# Altium PCB BuckConverter.PcbDoc
Units mm, origin at the board's own origin, x right, y up, seen from the top; angles counter-clockwise.
Board outline 40.64 x 20.32 mm, 2 copper layers (Top Layer, Bottom Layer); 39 components, 16 nets, 118 pads, 59 vias.
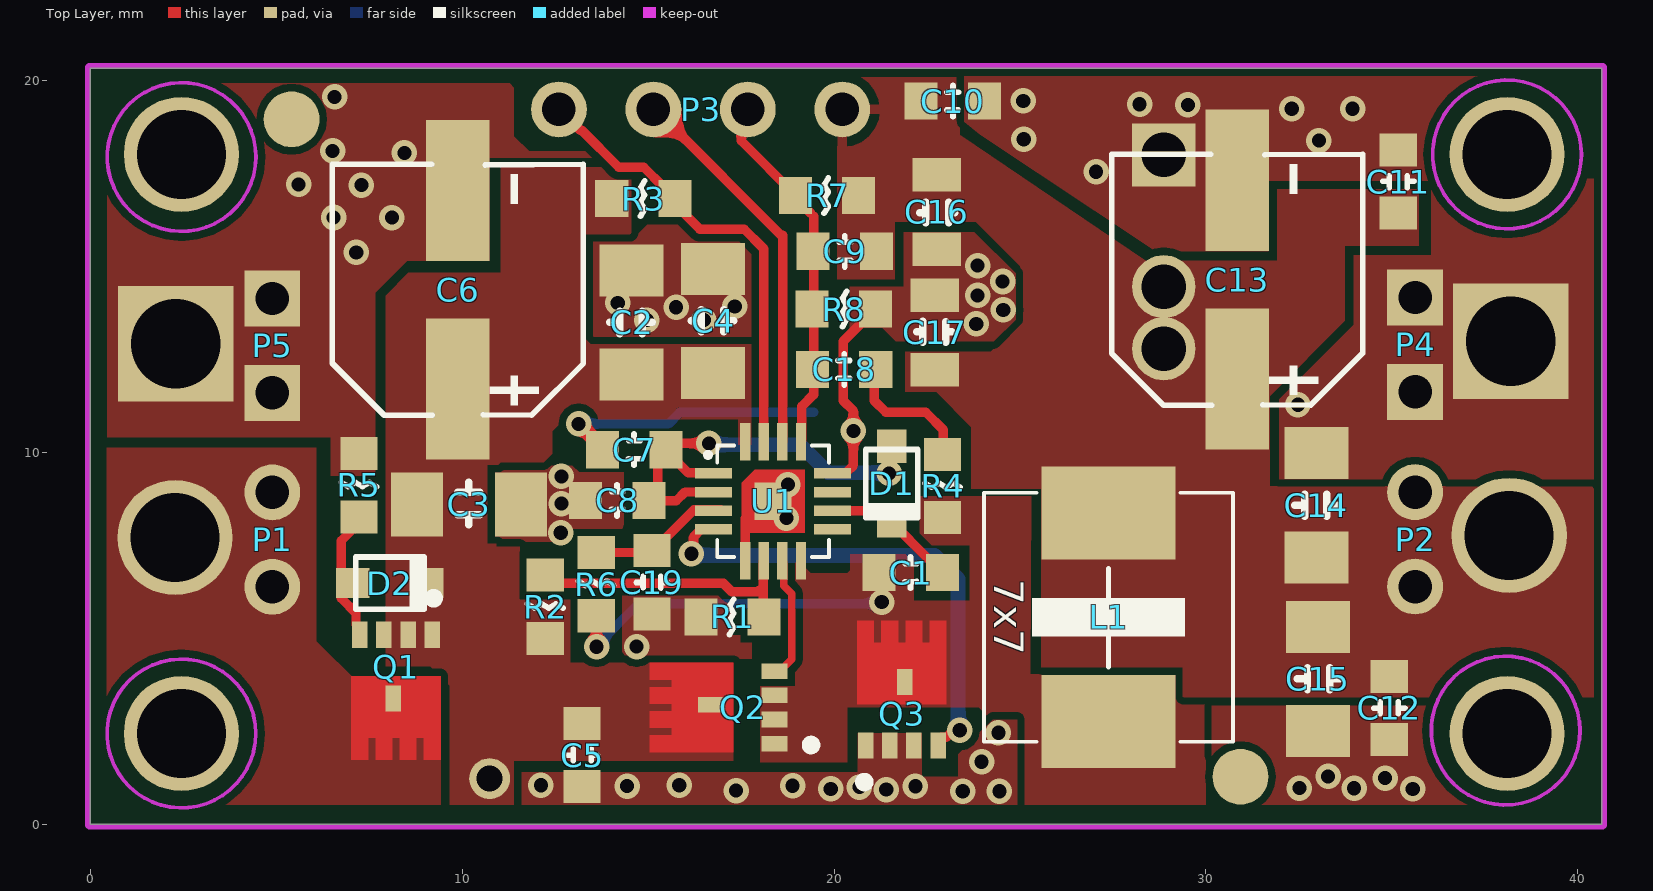
[diagram p0: Top Layer view]
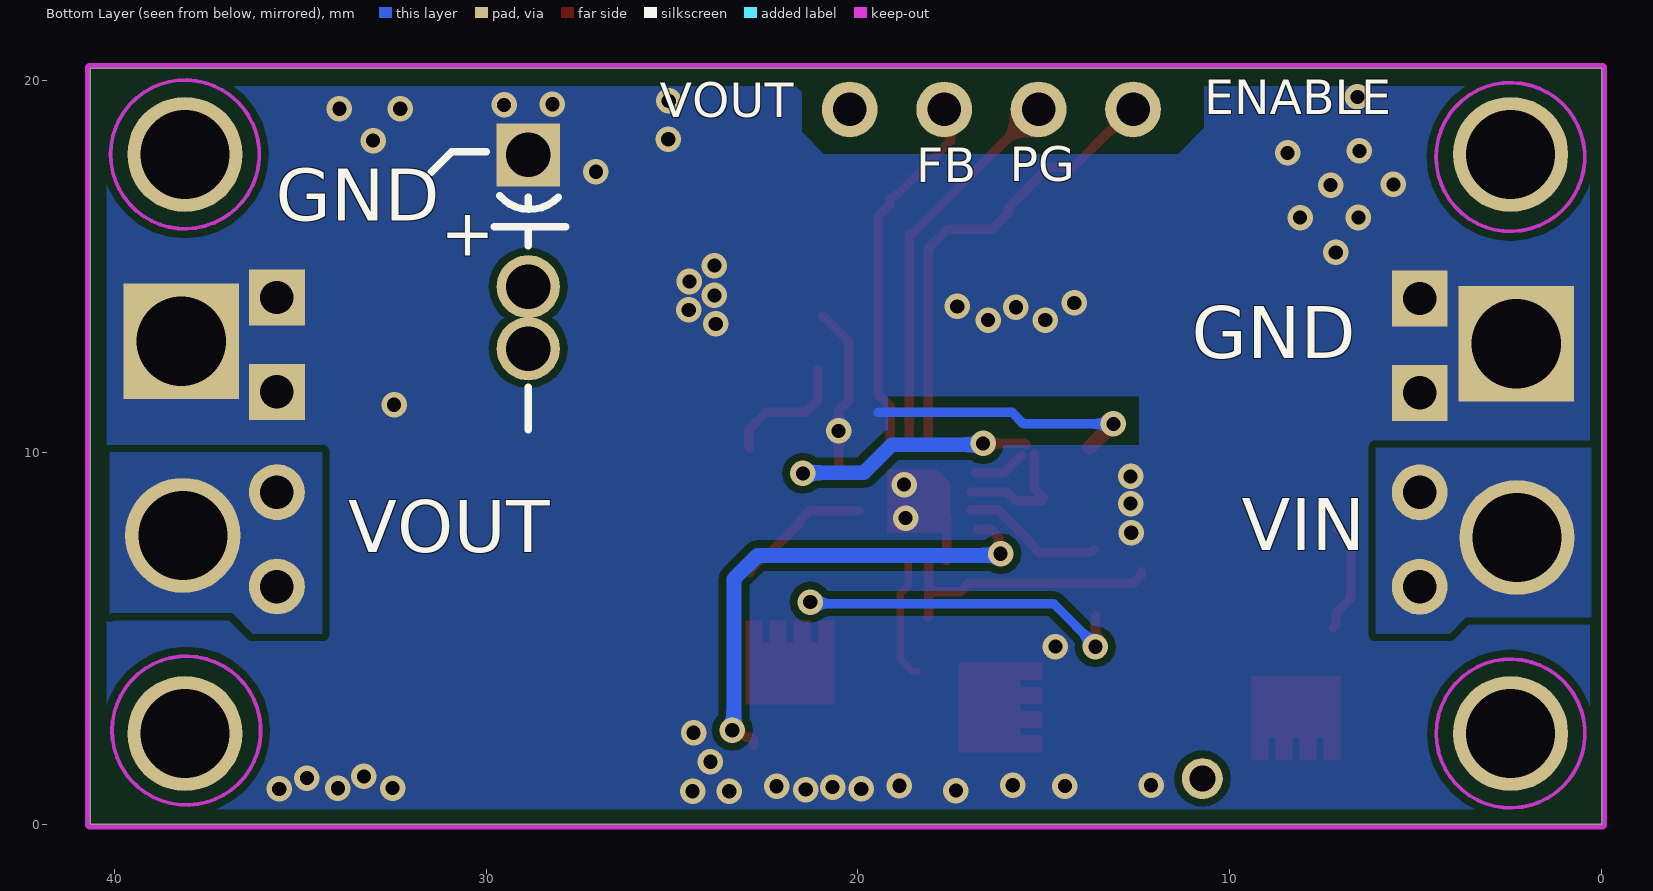
[diagram p1: Bottom Layer view, seen from below]
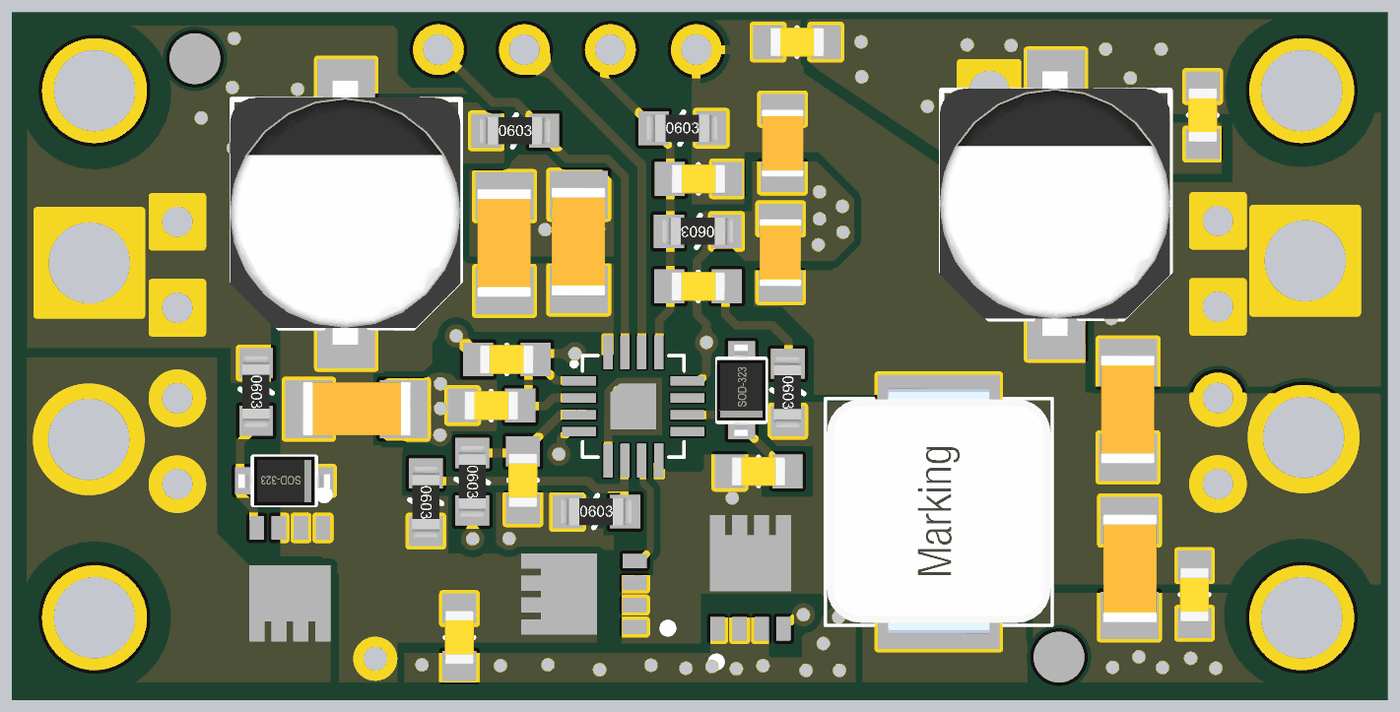
[diagram p2: 3D render of the assembled board from above, using the file's embedded part models]

## Layer stack, top to bottom
Top Solder: solder mask 0.0102, Solder Resist, Dk 3.5
Top Layer: signal copper 0.0356
Dielectric 1: dielectric 0.32, FR-4, Dk 4.8
Bottom Layer: signal copper 0.0356
Bottom Solder: solder mask 0.0102, Solder Resist, Dk 3.5

## Board outline
0,0 40.64,0 40.64,20.32 0,20.32

## Design rules (kind name [scope] priority, off if disabled: settings)
Clearance [All] p1: gap=0.2 ignorepadtopadclearanceinfootprint=FALSE
PlaneConnect [All] p1: planeconnectstyle=Direct reliefexpansion=0.508 reliefentries=4 reliefconductorwidth=0.254 reliefairgap=0.254
PolygonConnect CAM_PolygonConnect_$Net7 [InNet('$Net7')] p1: connectstyle=Direct reliefconductorwidth=0.254 reliefentries=4 polygonreliefangle="90 Angle" airgapwidth=0.254
PolygonConnect CAM_PolygonConnect_$Net0 [InNet('$Net0')] p2: connectstyle=Direct reliefconductorwidth=0.254 reliefentries=4 polygonreliefangle="90 Angle" airgapwidth=0.254
PolygonConnect [All] p3: connectstyle=Direct reliefconductorwidth=0.254 reliefentries=4 polygonreliefangle="90 Angle" airgapwidth=0.254
RoutingVias [All] p1: holewidth=0.711 width=1.27 viastyle="Through Hole" minholewidth=0.711 minwidth=1.27 maxholewidth=0.711 maxwidth=1.27
SolderMaskExpansion [All] p1: expansion=0.102 istentingtop=FALSE
Width [All] p1: maxlimit=0.254 minlimit=0.254 preferedwidth=0.254
29 further rules are at their usual default settings.

## Components (designator, comment, footprint, x,y, rotation, side; value= is the part's Value field where it differs from the comment)
C1 "100nF" C0603-NO 22.06,6.76 r180 top
C2 "2.2uF/50V" C1206-NO 14.554,13.491 r90 top
C3 "2.2uF/50V" C1206-NO 10.177,8.597 r0 top
C4 "2.2uF/50V" C1206-NO 16.748,13.533 r90 top
C5 "0.47uF/50V" C0603-NO 13.222,1.855 r270 top
C6 "47uF/50V" CAP-SMD_BD6.3-L6.6-W6.6-FD-1 9.88,14.37 r90 top
C7 "4.7uF/50V" C0603-NO 14.624,10.067 r180 top
C8 "4.7uF/50V" C0603-NO 14.167,8.703 r180 top
C9 "4.7nF" C0603-NO 20.287,15.402 r180 top
C10 "2.2uF/10V" C0603-NO 23.191,19.442 r0 top
C11 "2.2uF/10V" C0603-NO 35.175,17.279 r90 top
C12 "100nF/10V" C0603-NO 34.933,3.12 r270 top
C13 "330uF/10V" CAP-SMD_BD6.3-L6.6-W6.6-FD-1 30.84,14.64 r90 top
C14 "47uF/10V" C1206-NO 32.973,8.572 r90 top
C15 "47uF/10V" C1206-NO 33.012,3.904 r270 top
C16 "10uF/10V" C0805-NO 22.765,16.461 r270 top
C17 "10uF/10V" C0805-NO 22.71,13.22 r90 top
C18 "100nF" C0603-NO 20.271,12.224 r0 top
C19 "15pF" C0603-NO 15.099,6.5 r270 top
D1 "NSVR0340HT1G" SOD-323 21.553,9.155 r90 top
D2 "16.2V" SOD-323 8.05,6.48 r180 top
L1 "1.8uH" INDUCTOR_7X7MM_SMD 27.38,5.56 r270 top
P1 "Header 2" HDR1X2#1 4.892,6.379 r90 top
P2 "Header 2" HDR1X2#1 35.626,6.386 r90 top
P3 "Header 4" HDR1X4 12.6,19.219 r0 top
P4 "Header 2" HDR1X2#2 35.626,11.62 r90 top
P5 "Header 2" HDR1X2#2 4.892,11.593 r90 top
Q1 "DMP2305u-7" POWERDI3333-8_L3.3-W3.3-P0.65-BL 8.217,4.12 r180 top
Q2 "TPH3R704PL" POWERDI3333-8_L3.3-W3.3-P0.65-BL 17.43,3.134 r90 top
Q3 "TPH3R704PL" POWERDI3333-8_L3.3-W3.3-P0.65-BL 21.821,3.078 r0 top
R1 "100kΩ" R0603-NO 17.266,5.571 r0 top
R2 "360kΩ" R0603-NO 12.23,5.843 r270 top
R3 "100kΩ" R0603-NO 14.87,16.82 r0 top
R4 "4.7kΩ" R0603-NO 22.919,9.089 r270 top
R5 "100kΩ" R0603-NO 7.22,9.11 r270 top
R6 "1.5kΩ" R0603-NO 13.601,6.451 r270 top
R7 "16.2kΩ" R0603-NO 19.809,16.9 r0 top
R8 "3.09kΩ" R0603-NO 20.26,13.85 r180 top
U1 "MIC2101YML-TR" VQFN-16_L3.0-W3.0-P0.50-BL-EP1.7 18.36,8.679 r270 top

## Footprints (in the part's own frame and the unit in brackets; to place one, negate y for a bottom-side part, rotate by r counter-clockwise, add the part's x,y. Pads: shape width x height; smd on the part's side, far side on the other; paste and mask are expansions set on the pad)
C0603-NO [mm]
  rect 0.889x1 smd mask+0.102: 1(-0.85,0) 2(0.85,0)
  silkscreen extent -0.16,-0.42 0.15,0.42, body extent -0.8,-0.43 0.81,0.43, height 0.8
C0805-NO [mm]
  rect 0.9x1.3 smd: 1(-1,0) 2(1,0)
  silkscreen extent -0.26,-0.46 0.3,0.48, body extent -1,-0.62 1,0.63, height 0.85
C1206-NO [mm]
  rect 1.4x1.72 smd: 1(-1.4,0) 2(1.4,0)
  silkscreen extent -0.3,-0.55 0.3,0.59, body extent -1.59,-0.79 1.61,0.81, height 1.45
CAP-SMD_BD6.3-L6.6-W6.6-FD-1 [mm]
  rect 3.8x1.7 smd: 1(-2.67,0) 2(2.67,0)
  silkscreen extent -3.38,-3.38 3.38,3.38, body extent -3.87,-3.37 3.93,3.43, height 5.5
HDR1X2#1 [mm] "Connector; Header; 2 Position"
  round 1.5 hole 0.9: 1(0,0) 2(2.54,0)
HDR1X2#2 [mm] "Connector; Header; 2 Position"
  rect 1.5x1.5 hole 0.9: 1(0,0) 2(2.54,0)
HDR1X4 [mm] "Connector; Header; 4 Position"
  round 1.5 hole 0.9: 1(0,0) 2(2.54,0) 3(5.08,0) 4(7.62,0)
INDUCTOR_7X7MM_SMD [mm]
  rect 2.5x3.6 smd: 1(-2.8,0) 2(2.8,0)
  silkscreen extent -3.35,-3.35 3.35,3.35, body extent -3.68,-3.3 3.62,3.3, height 2.7
POWERDI3333-8_L3.3-W3.3-P0.65-BL [mm]
  rect 0.42x0.7 smd: 1(0.975,-0.97) 2(-0.975,-0.97) 2(-0.325,-0.97) 2(0.325,-0.97) 3(0.076,0.742)
  Top Layer region: -1.2,0.14 -1.2,2.39 -0.75,2.39 -0.75,1.8 -0.55,1.8 -0.55,2.39 -0.1,2.39 -0.1,1.8 0.1,1.8 0.1,2.39 0.55,2.39 0.55,1.8 0.75,1.8 0.75,2.39 1.2,2.39 1.2,0.14
  silkscreen extent -1.13,-2.07 -0.89,-1.83, body extent -1.43,-0.97 1.47,2.09, height 0.7
R0603-NO [mm]
  rect 0.889x1 smd: 1(-0.85,0) 2(0.85,0)
  silkscreen extent -0.08,-0.48 0.04,0.48, body extent -1.06,-0.4 1.04,0.4, height 0.5
SOD-323 [mm]
  rect 0.9x0.8 smd: A(1,0) K(-1,0)
  silkscreen extent -0.92,-0.7 0.92,0.71, body extent -1.35,-0.71 1.35,0.73, height 1.17
VQFN-16_L3.0-W3.0-P0.50-BL-EP1.7 [mm]
  rect 0.28x1 smd paste-100 mask+0.051: 1(-0.749,-1.6) 2(-0.249,-1.6) 3(0.249,-1.6) 4(0.749,-1.6) 9(0.749,1.6) 10(0.249,1.6) 11(-0.249,1.6) 12(-0.749,1.6)
  rect 1x0.28 smd paste-100 mask+0.051: 5(1.6,-0.749) 6(1.6,-0.249) 7(1.6,0.249) 8(1.6,0.749) 13(-1.6,0.749) 14(-1.6,0.249) 15(-1.6,-0.249) 16(-1.6,-0.749)
  rect 1x1 smd: 17(0,0)
  Top Layer region: -0.85,-0.5 -0.85,0.85 0.85,0.85 0.85,-0.85 -0.5,-0.85
  silkscreen extent -1.5,-1.76 1.5,1.5, body extent -1.5,-1.5 1.5,1.5, height 0.55

## Part data
C1 C5 C7 C8 C9 C10 C11 C12 C18 C19: library part Cap_0603, "Capacitor, X5R, ±10%, 6.3V", Manufacturer=N.A., Part Number=C0603-N.C., Volts=6.3V, Artikkelnr Noca=20069060, Artikkelnr Simpro=N.A., Footprint Doc=0603, LatestRevisionDate=2009-11-23, Manufacturer Part Number=N.A., Pin Count=2, Published=2009-05-08, Publisher="Nordic Semiconductor"
C2 C3 C4 C14 C15: library part Cap_1206, "Capacitor, X5R, ±10%, 6.3V", Manufacturer=N.A., Specification="X7R, ±10%, 16V"
C6 C13: library part CAP-ELECT-SMD, "Smd Aluminum Electrolytic Capacitor"
C16 C17: library part Cap_0805, "Capacitor, X5R, ±10%, 6.3V", Manufacturer=N.A., Specification="X7R, ±10%, 16V"
D1: library part DIODE-NSVR0340HT1G, "Schottky Diode  / NSVR0340HT1G"
D2: library part DIODE-Zener, "Zener Diode", LatestRevisionDate=17-Jul-2002, LatestRevisionNote="Re-released for DXP Platform.", PackageDescription="Diode, Thru-Hole; 2 Leads; 0.7 in Pin Spacing", PackageReference=DIODE-0.7, Published=8-Jun-2000, Publisher="Altium Limited"
L1: library part Inductor, "SMD Inductor 7x7MM"
P1 P2 P4 P5: "Header, 2-Pin", LatestRevisionDate=17-Jul-2002, LatestRevisionNote="Re-released for DXP Platform.", Publisher="Altium Limited"
P3: "Header, 4-Pin", LatestRevisionDate=17-Jul-2002, LatestRevisionNote="Re-released for DXP Platform.", Publisher="Altium Limited"
Q1: library part MOSFET-DMP4025SFG, "P Channel Mosfet"
Q2 Q3: library part MOSFET-AON7212, "N Channel Mosfet 40V 92A dfn-8"
R1 R2 R3 R5: library part Res_0603, "Chip Resistor, ±1%, 0.100W", Part Number=R0603-N.C.Ω, Artikkelnr Noca=N.A., Artikkelnr Simpro=N.A., Footprint Doc=0603, LatestRevisionDate=2009-05-08, Note="Chip Res", Pin Count=2, Published=2009-05-08, Publisher="Nordic Semiconductor"
R4 R6 R7 R8: library part Res_0603, "Resistor, ±1%, 0.100W", Manufacturer=N.A., Part Number=R0603-N.C.Ω, Artikkelnr Noca=N.A., Artikkelnr Simpro=N.A., Footprint Doc=0603, LatestRevisionDate=2009-05-08, Manufacturer Part Number=N.A., Note="Chip Res", Pin Count=2, Published=2009-05-08, Publisher="Nordic Semiconductor"
U1: "DC-DC Converters MLF-16", Manufacturer=MICROCHIP(美国微芯), Contributor=lcsc, Manufacturer Part=MIC2101YML-TR, spicePre=U, spiceSymbolName=MIC2101YML-TR, Supplier=LCSC, Supplier Part=C621528

## Free pads (board coordinates)
  round 3.1 hole 2.4: 1(2.275,7.704) 1(2.446,2.433) 1(2.446,18.008) 1(38.098,2.433) 1(38.098,18.008) 1(38.155,7.762)
  rect 3.1x3.1 hole 2.4: 1(2.291,12.918) 1(38.201,12.982)
  round 1.5 smd: 1(5.41,18.952) 1(30.93,1.27)
  round 1.1 hole 0.7: 1(10.736,1.222)
  round 1.7 hole 1.2: 1(28.866,12.782) 1(28.866,14.451)
  rect 1.7x1.7 hole 1.2: 1(28.866,17.994)

## Via types
v1: diameter 0.686, hole 0.381, Top Layer to Bottom Layer, tented both sides, 59 vias

## Nets (pads, with @x,y where several pads share a name; then routed paths per layer and width w, separated by ;. In a path a pad name is that pad's centre, name@x,y a point inside that pad or via, vN(x,y) a via of type N, cw(c..) or ccw(c..) an arc to the next point about the centre after c; other vN are vias at no path point)
+5V: C9.1 C10.1 C11.1 C12.1 C13.1 C14.1 C15.1 C16.1 C17.1 L1.1 P2.1 P2.2 P3.4 pad.1@28.866,12.782 pad.1@28.866,14.451 pad.1@38.155,7.762 R7.2
EN: P3.1 R3.2 U1.15 | length 11.7
  Top Layer w0.254: P3.1@13.057,18.772 13.176,18.653 13.216,18.653 14.208,17.661 14.883,17.661 15.399,17.145 15.399,17.105 15.954,16.55 15.954,16.431 16.391,15.994 17.582,15.994 18.058,15.518 18.111,15.465 U1.15
FB: C9.2 C18.1 P3.3 R7.1 R8.2 U1.13 | length 9.2
  Top Layer w0.254: P3.3@17.701,18.772 17.502,18.574 17.502,18.375 R7.1@18.971,16.907 ; U1.13@19.129,10.319 19.129,11.232 19.447,11.549 19.447,16.351 ; R7.1@19.129,16.828 19.129,16.669 R7.1@19.367,16.431
GND: C2.2 C3.2 C4.2 C5.2 C6.2 C7.2 C8.2 C10.2 C11.2 C12.2 C13.2 C14.2 C15.2 C16.2 C17.2 C19.2 P4.1 P4.2 P5.1 P5.2 pad.1@2.291,12.918 pad.1@28.866,17.994 pad.1@38.201,12.982 Q3.2 R1.1 R5.1 R8.1 U1.5 U1.12 U1.17 | length 14.7
  Top Layer w0.254: v1(13.129,10.762) v1@13.134,10.762 ; C7.2 C7.2@13.774,10.122 ; U1.5 17.61,8.227 v1(18.715,8.227) ; U1.12@19.963,9.446 20.32,9.446 20.518,9.644 20.518,11.112 20.241,11.39 20.241,12.978 20.915,13.652 R8.1@20.955,13.652
  Top Layer w0.4: v1@13.134,10.762 C7.2@13.774,10.122
  Bottom Layer w0.254: v1(13.129,10.762) 15.542,10.762 15.85,11.07 19.45,11.07
  other v1: 17.362,0.899 23.458,0.879 24.446,0.879 19.91,0.943 21.402,0.927 35.561,0.943 32.515,0.968 33.985,0.962 20.681,0.992 14.434,1.018 22.187,1.016 12.116,1.043 15.836,1.043 18.882,1.03 34.82,1.236 33.287,1.279 23.968,1.672 24.42,2.454 14.689,4.773 12.649,7.834 12.665,8.62 18.756,9.13 12.665,9.348 20.519,10.571 32.472,11.275 23.821,13.452 14.96,13.552 16.497,13.552 24.551,13.825 15.75,13.899 17.329,13.92 14.181,14.015 23.857,14.217 24.533,14.59 23.857,15.017 7.15,15.373 6.54,16.312 8.108,16.309 5.596,17.201 7.287,17.183 27.045,17.543 8.442,18.049 6.513,18.104 33.039,18.38 25.103,18.416 32.309,19.235 33.946,19.235 29.515,19.341 28.216,19.359 25.085,19.448 6.568,19.554
NetC1_1: C1.1 D1.K U1.10 | length 3.7
  Top Layer w0.254: U1.10 21.28,8.43 D1.K D1.K 21.553,8.105 22.525,7.133 22.592,7.133 22.91,6.816 C1.1
NetC1_2: C1.2 L1.2 Q2.2 Q3.3 R4.2 R6.2 U1.8 | length 9
  Top Layer w0.254: R6.2 13.612,5.591 v1(13.612,4.765)
  Bottom Layer w0.25: v1@13.573,4.763 14.736,5.925 v1@21.241,5.925
  other v1: 21.28,5.969
NetC2_1: C2.1 C3.1 C4.1 C5.1 C6.1 D2.K pad.1@10.736,1.222 Q1.2 Q2.3 R2.2 R3.1 U1.16
NetC7_1: C7.1 C8.1 D1.A U1.1 U1.2 | length 11.2
  Top Layer w0.254: C8.1@15.002,8.771 15.26,9.029 C7.1@15.26,9.961 ; C8.1@15.042,8.692 15.756,8.692 15.994,8.93 U1.2@16.947,8.93 ; C7.1@15.478,10.2 15.518,10.239 v1@16.669,10.239 ; C7.1@15.597,9.922 16.073,9.446 U1.1@16.828,9.446
  Bottom Layer w0.4: v1@16.589,10.2 19.09,10.2 19.844,9.446 v1@21.511,9.446
  other v1: 21.479,9.431 16.633,10.234
NetC18_2: C18.2 R4.1 | length 3.5
  Top Layer w0.254: C18.2@21.074,12.224 21.074,11.39 21.392,11.073 22.463,11.073 22.939,10.597 22.939,10.16 R4.1@22.9,10.12
NetC19_1: C19.1 R6.1 U1.3 | length 3.8
  Top Layer w0.254: R6.1@13.652,7.382 13.732,7.302 15.121,7.302 15.399,7.58 15.399,7.62 16.232,8.453 U1.3@16.947,8.453
NetD2_A: D2.A Q1.1 R5.2 | length 3
  Top Layer w0.25: R5.2@7.104,7.938 7.064,7.938 6.747,7.62 6.747,6.072 7.144,5.675 7.144,5.358 Q1.1@7.223,5.278
NetQ2_1: Q2.1 U1.7 | length 3.3
  Top Layer w0.203: Q2.1 18.54,4.109 18.862,4.431 18.862,6.196 18.647,6.41 18.647,7.041 U1.7
NetQ3_1: Q3.1 U1.4 | length 13.5
  Top Layer w0.254: v1(16.16,7.267) 16.22,7.328 16.22,7.723 16.427,7.93 U1.4 ; Q3.1 22.796,2.248 22.879,2.331 23.019,2.331 23.128,2.44 23.298,2.44 v1(23.38,2.522)
  Bottom Layer w0.4: v1@16.113,7.263 16.153,7.223 22.701,7.223 23.336,6.588 v1@23.336,2.54
NetR1_2: R1.2 R2.1 U1.6 | length 7.5
  Top Layer w0.254: R2.1@12.383,6.787 12.383,6.69 12.603,6.469 17.026,6.469 17.243,6.252 17.948,6.252 17.984,6.287 18.097,6.287 ; U1.6@18.097,6.605 18.097,6.287 ; U1.6@18.098,6.606 U1.6@18.098,7.066 ; R1.2 18.097,5.589 18.097,6.287
PG: P3.2 U1.14 | length 9.9
  Top Layer w0.254: P3.2@15.478,18.931 18.574,15.835 ; U1.14@18.614,10.279 18.614,15.835
VIN: P1.1 P1.2 pad.1@2.275,7.704 Q1.3
pads on no net: U1.9 U1.11

## Polygon pours and split planes (outlines as drawn)
+5V on Bottom Layer "Bottom Layer-No Net" (solid, pour order 1): 40.124,10.001 40.124,7.779 40.124,5.636 40.084,5.675 36.83,5.675 36.274,5.12 34.409,5.12 34.409,7.62 34.409,10.001
VIN on Bottom Layer "Bottom Layer-No Net 1" (solid, pour order 0): 0.278,7.898 0.278,5.556 3.651,5.556 4.088,5.12 6.072,5.12 6.072,7.58 6.072,10.12 0.278,10.12
GND on Bottom Layer "Bottom Layer-GND" (solid, remove dead copper, pour order 2): 0.476,0.397 40.045,0.397 40.203,0.556 40.203,19.725 40.084,19.844 21.669,19.844 21.511,19.685 21.511,18.613 20.915,18.018 11.39,18.018 10.68,18.728 10.68,19.844 0.516,19.844 0.318,19.645 0.318,0.357
VIN on Top Layer "Top Layer-VIN" (solid, remove dead copper, pour order 12): 6.072,10.12 6.072,7.501 6.072,4.921 7.183,3.81 8.771,3.81 9.417,3.164 9.417,0.516 0.516,0.516 0.437,0.437 0.437,5.219 0.437,10.12
GND on Top Layer "NONET_L02_P-001" (solid, pour order 19): 14.34,7.899 13.157,7.899 12.848,7.59 10.729,7.59 10.623,7.483 10.623,9.64 12.96,9.64 13.143,9.457 14.34,9.457
GND on Top Layer "NONET_L02_P-001" (solid, pour order 18): 14.34,4.47 14.37,4.44 17.78,4.44 17.78,4.97 17.79,4.98 17.69,5.08 17.25,5.08 17.25,6.245 17.075,6.42 14.3,6.42 14.3,4.53 14.37,4.46
GND on Top Layer "NONET_L02_P-001" (solid, pour order 17): 13.388,12.967 17.82,12.967 17.82,15.38 17.41,15.79 16.21,15.79 15.88,16.12 14.975,16.12 14.558,15.703 13.404,15.703 13.404,12.982
NetC1_2 on Top Layer "Top Layer-NetC51_2" (solid, pour order 16): 23.892,3.135 24.17,2.857 25.082,2.857 25.082,0.556 25.043,0.516 30,0.516 30,4.03 25.281,4.03 25.297,8.811 22.304,8.811 22.304,7.501 23.654,7.501 23.654,6.787 23.654,6.01 22.146,6.01 22.146,7.26 20.439,7.26 20.439,6.826 20.36,6.747 19.526,6.747 19.367,6.747 19.09,7.025 18.931,7.025 18.931,3.929 18.891,3.889 18.018,3.889 18.018,1.667 20.36,1.667 20.36,2.361 20.36,3.135
GND on Top Layer "Top Layer-GND" (solid, pour order 7): 20.42,13.34 21.3,13.34 21.662,12.978 24.294,12.978 24.881,13.565 24.881,14.809 23.775,15.915 21.868,15.915 21.868,14.446 20.42,14.446
GND on Top Layer "Top Layer-GND 1" (solid, remove dead copper, pour order 13): 36.06,17.36 36.06,15.299 33.97,15.299 33.97,13.43 31.97,11.43 31.97,9.27 40.6,9.27 40.6,17.36
NetC2_1 on Top Layer "Top Layer-BVIN" (solid, pour order 3): 7.938,4.239 9.136,4.239 9.66,3.715 9.66,0.516 11.39,0.516 11.39,1.7 17.29,1.7 17.29,4.34 12.898,4.34 12.898,5.993 12.938,6.032 11.549,6.032 11.549,7.461 10.914,7.461 10.914,9.604 11.033,9.723 12.184,9.723 12.422,9.962 12.422,10.557 12.745,10.88 17.42,10.88 17.42,10.2 17.78,10.2 17.78,12.898 13.457,12.898 13.32,13.035 13.32,15.86 14.51,15.86 14.545,15.895 14.545,17.661 11.033,17.661 11.033,14.82 8.55,14.82 7.938,14.208
GND on Top Layer "Top Layer-GND 2" (solid, remove dead copper, pour order 11): 10.73,15.15 8.522,15.15 7.66,14.287 7.66,9.36 6.469,9.36 6.469,10.398 0.45,10.398 0.45,19.923 11.271,19.923 11.39,19.804 11.39,18.494 11.795,18.09 13.494,18.09 13.494,17.92 10.73,17.92
+5V on Top Layer "Top Layer-+5V" (solid, remove dead copper, pour order 15): 21.907,11.628 21.907,12.7 24.209,12.7 25.003,13.494 25.003,15.002 23.812,16.192 21.63,16.192 21.63,14.645 20.08,14.645 20.08,20.09 23.376,20.09 23.376,18.534 28.38,15.143 31.92,15.143 31.92,17.066 35.73,17.066 35.73,15.557 33.74,15.557 33.74,13.539 31.71,11.509 31.71,9.088 40.362,9.088 40.442,9.009 40.442,3.41 25.57,3.41 25.57,9.015 23.693,9.015 23.693,10.676 22.741,11.628
GND on Top Layer "Top Layer-GND 3" (solid, pour order 6): 24.924,0.516 24.924,2.81 24.27,2.81 23.336,1.876 23.336,1.27 22.36,1.27 22.36,2.44 20.637,2.44 20.637,1.389 11.589,1.389 11.589,0.516
GND on Top Layer "Top Layer-GND 4" (solid, remove dead copper, pour order 10): 30.16,3.175 30.16,0.516 40.19,0.516 40.19,3.175
GND on Top Layer "Top Layer-GND 5" (solid, remove dead copper, pour order 8): 40.28,17.304 40.28,20.17 23.495,20.17 23.495,18.891 23.932,18.534 28.659,15.4 31.67,15.4 31.67,17.304

## Keep-outs
Top Layer:
  circle w0.1: c38.06,2.513 r2
  circle w0.1: c38.098,18.008 r2
  circle w0.1: c2.45,17.94 r2
  circle w0.1: c2.446,2.433 r2
Bottom Layer:
  circle w0.1: c2.446,2.433 r2
  circle w0.1: c2.45,17.94 r2
  circle w0.1: c38.06,2.513 r2
  circle w0.1: c38.098,18.008 r2
Keep-Out Layer:
  lines w0.152: -0.076,0 ccw(c0,0) 0,-0.076 ; -0.076,0 ccw(c0,0) 0,-0.076 ; -0.076,0 -0.076,20.32 ; -0.076,20.32 cw(c0,20.32) 0,20.396 ; -0.076,20.32 cw(c0,20.32) 0,20.396 ; 0,-0.076 40.64,-0.076 ; 0,20.396 40.64,20.396 ; 40.64,-0.076 ccw(c40.64,0) 40.716,0 ; 40.64,-0.076 ccw(c40.64,0) 40.716,0 ; 40.64,20.396 cw(c40.64,20.32) 40.716,20.32 ; 40.64,20.396 cw(c40.64,20.32) 40.716,20.32 ; 40.716,0 40.716,20.32

## Other copper
Bottom Layer:
  pour cut-out: 12.45,10.2 19.19,10.2 19.19,11.49 12.45,11.49

## Silkscreen, mask and mechanical layers (free items; w line width, h text height)
Bottom Overlay:
  lines w0.2: 27.85,16.06 29.78,16.06 ; 28.06,16.86 ccw(c28.827,17.584) 29.63,16.9 ; 28.866,10.596 28.87,11.75 ; 28.87,15.55 28.87,16.06 ; 28.87,16.55 28.87,16.86 ; 30,18.08 30.92,18.08 31.47,17.53
  text "ENABLE" at 10.68,18.78 h1.6
  text "VOUT" at 25.334,18.701 h1.6
  text "PG" at 15.922,16.976 h1.6
  text "FB" at 18.433,16.957 h1.6
  text "GND" at 35.653,15.772 h2.4
  text "+" at 29.762,14.871 h2.18
  text "GND" at 11.02,12.069 h2.4
  text "VIN" at 9.675,6.905 h2.4
  text "VOUT" at 33.713,6.857 h2.4

## Text inside footprints (layer, text, board x,y; h text height)
L1: Top Overlay "7x7" at 24.307,6.589 h0.8 r270
Q1: Mechanical 2 "dfn-8" at 8.263,8.766 h1.52 r180
Q2: Mechanical 2 "dfn-8" at 22.076,3.088 h1.52 r90
Q3: Mechanical 2 "dfn-8" at 21.775,-1.568 h1.52